# Altium PCB x-IMU3-SA-Light.PcbDoc
Units mm, origin at the board's own origin, x right, y up, seen from the top; angles counter-clockwise.
Board outline 12 x 10 mm, 2 copper layers (Top Layer, Bottom Layer), stack 1.569 mm thick; 9 components, 7 nets, 21 pads, 5 vias.
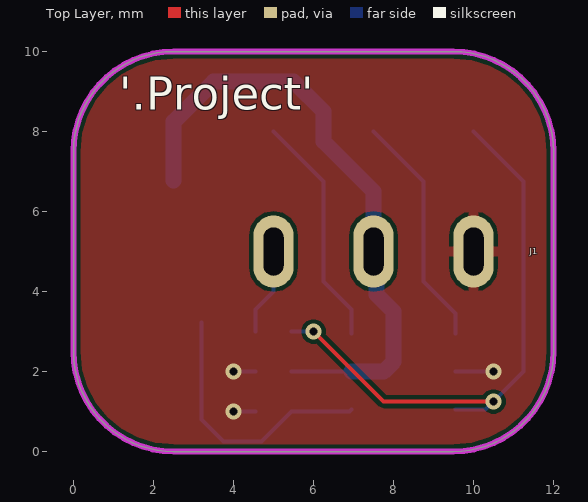
[diagram p0: Top Layer view]
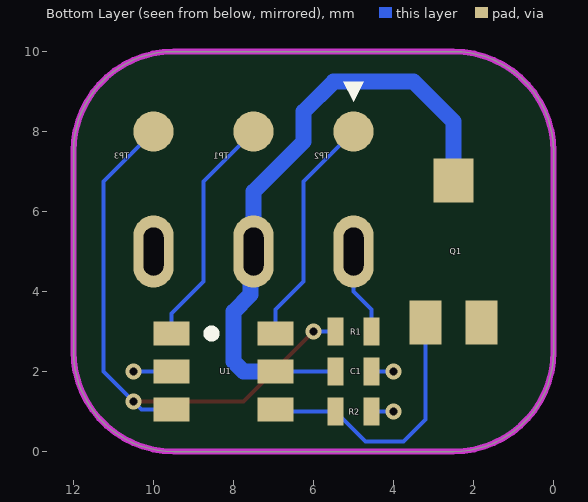
[diagram p1: Bottom Layer view, seen from below]

## Layer stack, top to bottom
Top Solder: solder mask 0.0254, SM-001, Dk 4
Top Layer: signal copper 0.035
Dielectric 1: core 1.4986, Core-043, Dk 4.3
Bottom Layer: signal copper 0.035
Bottom Solder: solder mask 0.0254, SM-001, Dk 4

## Board outline
0,2.5 0,7.5 cw(c2.5,7.5) 2.5,10 9.5,10 cw(c9.5,7.5) 12,7.5 12,2.504 cw(c9.496,2.504) 9.496,0 2.5,0 cw(c2.5,2.5)

## Design rules (kind name [scope] priority, off if disabled: settings)
Clearance [All] p1: gap=0.1 ignorepadtopadclearanceinfootprint=FALSE except(0: Arc-Hole Track-Hole SMDPad-Hole THPad-Hole Via-Hole Fill-Hole Poly-Hole Region-Hole Text-Hole)
DiffPairsRouting [All] p1: maxlimit=0.254 minlimit=0.1 mostfreqgap=0.1 toplayer_minwidth=0.1 toplayer_maxwidth=0.381 toplayer_prefwidth=0.1 bottomlayer_minwidth=0.1 bottomlayer_maxwidth=0.381 bottomlayer_prefwidth=0.1 maxuncoupledlength=12.7
HoleSize [All] p1: absolutevalues=TRUE maxlimit=10 minlimit=0.025 maxpercent=80.000 minpercent=20.000
MinimumSolderMaskSliver [All] p1: minsoldermaskwidth=0
PlaneClearance [All] p1: clearance=0.2
PlaneConnect [All] p1: planeconnectstyle=Direct reliefexpansion=0.508 reliefentries=4 reliefconductorwidth=0.254 reliefairgap=0.254
PolygonConnect [All] p1: thpad.connectstyle=Relief thpad.reliefconductorwidth=0.254 thpad.reliefentries=4 thpad.polygonreliefangle="90 Angle" thpad.airgapwidth=0.1 smdpad.connectstyle=Relief smdpad.reliefconductorwidth=0.254 smdpad.reliefentries=4 smdpad.polygonreliefangle="90 Angle" smdpad.airgapwidth=0.1 via.connectstyle=Direct via.reliefconductorwidth=0.254 via.reliefentries=4 via.polygonreliefangle="90 Angle" via.airgapwidth=0.254
RoutingVias [All] p1: holewidth=0.711 width=1.27 viastyle="Through Hole" minholewidth=0.2 minwidth=0.4 maxholewidth=0.711 maxwidth=1.27
SilkToSolderMaskClearance [IsPad] p1: minsilkscreentomaskgap=0.1 clearancetoexposedcopper=TRUE
SolderMaskExpansion [All] p1: expansion=0.102 istentingtop=FALSE
Width [All] p1: maxlimit=1 minlimit=0.1 preferedwidth=0.1
24 further rules are at their usual default settings.

## Components (designator, comment, footprint, x,y, rotation, side; value= is the part's Value field where it differs from the comment)
C1 "100nF" "Capacitor 0402" 5,2 r0 bottom
J1 "SP-3533-02" SP-3533-02 7.5,5 r180 top
Q1 "TEMT6000X01" TEMT6000X01 2.5,5 r90 bottom
R1 "470R" "Resistor 0402" 5,3 r0 bottom
R2 "10kR" "Resistor 0402" 5,1 r0 bottom
TP1 "Test Point" "Test Point 1mm" 7.5,8 r270 top
TP2 "Test Point" "Test Point 1mm" 5,8 r270 top
TP3 "Test Point" "Test Point 1mm" 10,8 r270 top
U1 "PIC10F322-I/OT" SOT-23-6 8.25,2 r270 bottom

## Footprints (in the part's own frame and the unit in brackets; to place one, negate y for a bottom-side part, rotate by r counter-clockwise, add the part's x,y. Pads: shape width x height; smd on the part's side, far side on the other; paste and mask are expansions set on the pad)
"Capacitor 0402" [mm]
  rect 0.4x0.7 smd: 1(-0.45,0) 2(0.45,0)
  body extent -0.5,-0.25 0.5,0.25, height 0.48
"Resistor 0402" [mm]
  rect 0.4x0.7 smd: 1(-0.45,0) 2(0.45,0)
  body extent -0.51,-0.25 0.49,0.25, height 0.34
SOT-23-6 [mm]
  rect 0.6x0.9 smd: 1(-0.95,-1.3) 2(0,-1.3) 3(0.95,-1.3) 4(0.95,1.3) 5(0,1.3) 6(-0.95,1.3)
  silkscreen extent -1.05,-0.4 -0.85,-0.2, body extent -1.4,-1.21 1.39,1.21, height 1.09
SP-3533-02 [mm]
  oval 1x1.8 hole 0.5 slot 1.2 at 90 deg: R(0,0) S(-2.5,0) T(2.5,0)
  body extent -21.85,-2.5 4.75,2.5, height 5
TEMT6000X01 [mm]
  rect 1.1x1 smd: Collector(1.775,0)
  rect 1.1x0.8 smd: Emitter(-1.775,0.7) ""(-1.775,-0.7)
  body extent -2,-1 2,1, height 1.02
"Test Point 1mm" [mm]
  round 1 smd far side paste-100: 1(0,0)

## Part data
C1: library part Capacitor
R1 R2: library part Resistor

## Via types
v1: diameter 0.4, hole 0.2, Top Layer to Bottom Layer, tented both sides, 5 vias

## Nets (pads, with @x,y where several pads share a name; then routed paths per layer and width w, separated by ;. In a path a pad name is that pad's centre, name@x,y a point inside that pad or via, vN(x,y) a via of type N, cw(c..) or ccw(c..) an arc to the next point about the centre after c; other vN are vias at no path point)
ADC: Q1.Emitter R2.2 U1.4 | length 6.7
  Bottom Layer w0.1: Q1.Emitter 3.2,0.8 3.75,0.25 4.7,0.25 R2.2 6.9,1 U1.4
GND: C1.1 J1.S R2.1 U1.2 | length 2
  Bottom Layer w0.1: v1(4,1) R2.1 ; v1(4,2) C1.1 ; U1.2 v1(10.5,2)
ICSPDAT: TP1.1 U1.1 | length 5.9
  Bottom Layer w0.1: TP1.1 8.75,6.75 8.75,4.25 9.55,3.45 U1.1
MCLR: TP2.1 U1.6 | length 5.9
  Bottom Layer w0.1: TP2.1 6.25,6.75 6.25,4.25 6.95,3.55 U1.6
TX: R1.2 TP3.1 U1.3 | length 14.4
  Top Layer w0.1: v1(6,3) 7.75,1.25 v1(10.5,1.25)
  Bottom Layer w0.1: R1.2 v1(6,3) ; U1.3 10.3,1.05 11.25,2 11.25,6.75 TP3.1
"TX R": J1.T R1.1 | length 2.2
  Bottom Layer w0.1: R1.1 4.55,3.55 5,4 J1.T
VDD: C1.2 J1.R Q1.Collector U1.5 | length 15.6
  Bottom Layer w0.1: C1.2 U1.5
  Bottom Layer w0.4: Q1.Collector 2.5,8.25 3.5,9.25 5.5,9.25 6.25,8.5 6.25,7.75 7.5,6.5 J1.R 7.578,4.922 7.578,3.922 8,3.5 8,2.25 7.75,2 U1.5
pads on no net: Q1.

## Polygon pours and split planes (outlines as drawn)
GND on Top Layer "NONET_L-01_P-001" (solid, remove dead copper, pour order 0): 12.5,0 12.5,10 0,10 0,0

## Keep-outs
Keep-Out Layer:
  the board outline again, w0.15

## Silkscreen, mask and mechanical layers (free items; w line width, h text height)
Top Overlay:
  text "'.Project'" at 1.143,8.264 h1.4
Bottom Overlay:
  region: 4.75,9.25 5.254,9.25 5,8.75